# Altium PCB TFTAdapter Version 3.PcbDoc (part 1 of 3)
Units mm, origin at the board's own origin, x right, y up, seen from the top; angles counter-clockwise.
Board outline 130 x 67 mm, 4 copper layers (L1, L2, L3, L4), stack 0.905 mm thick; 77 components, 105 nets, 466 pads, 376 vias.
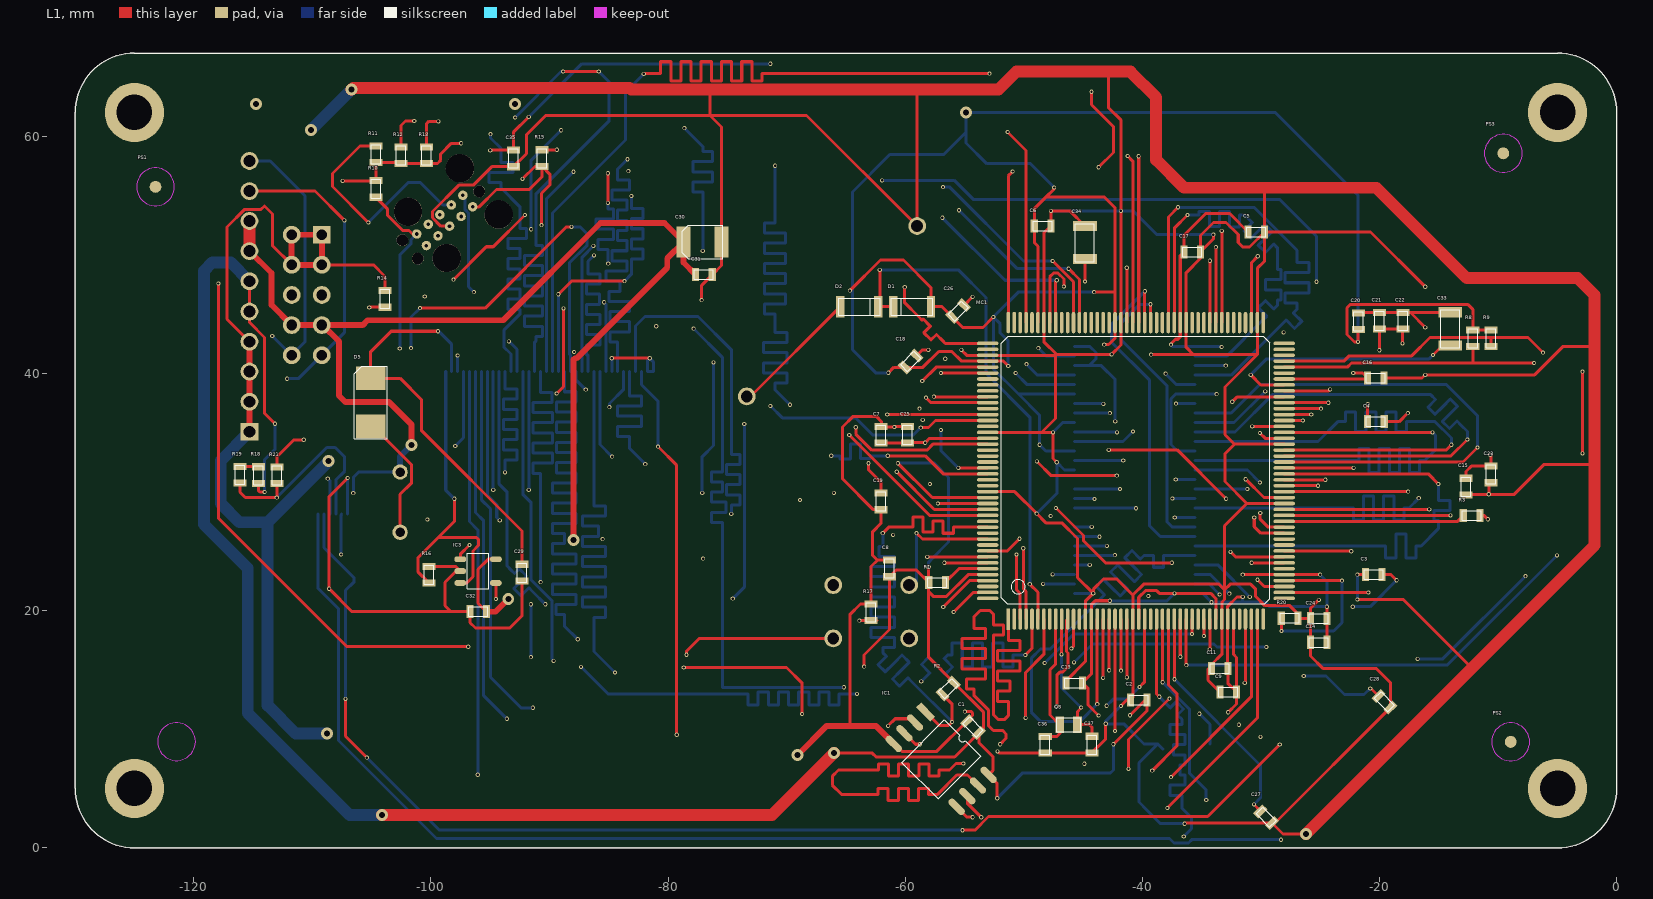
[diagram p0: L1 view]
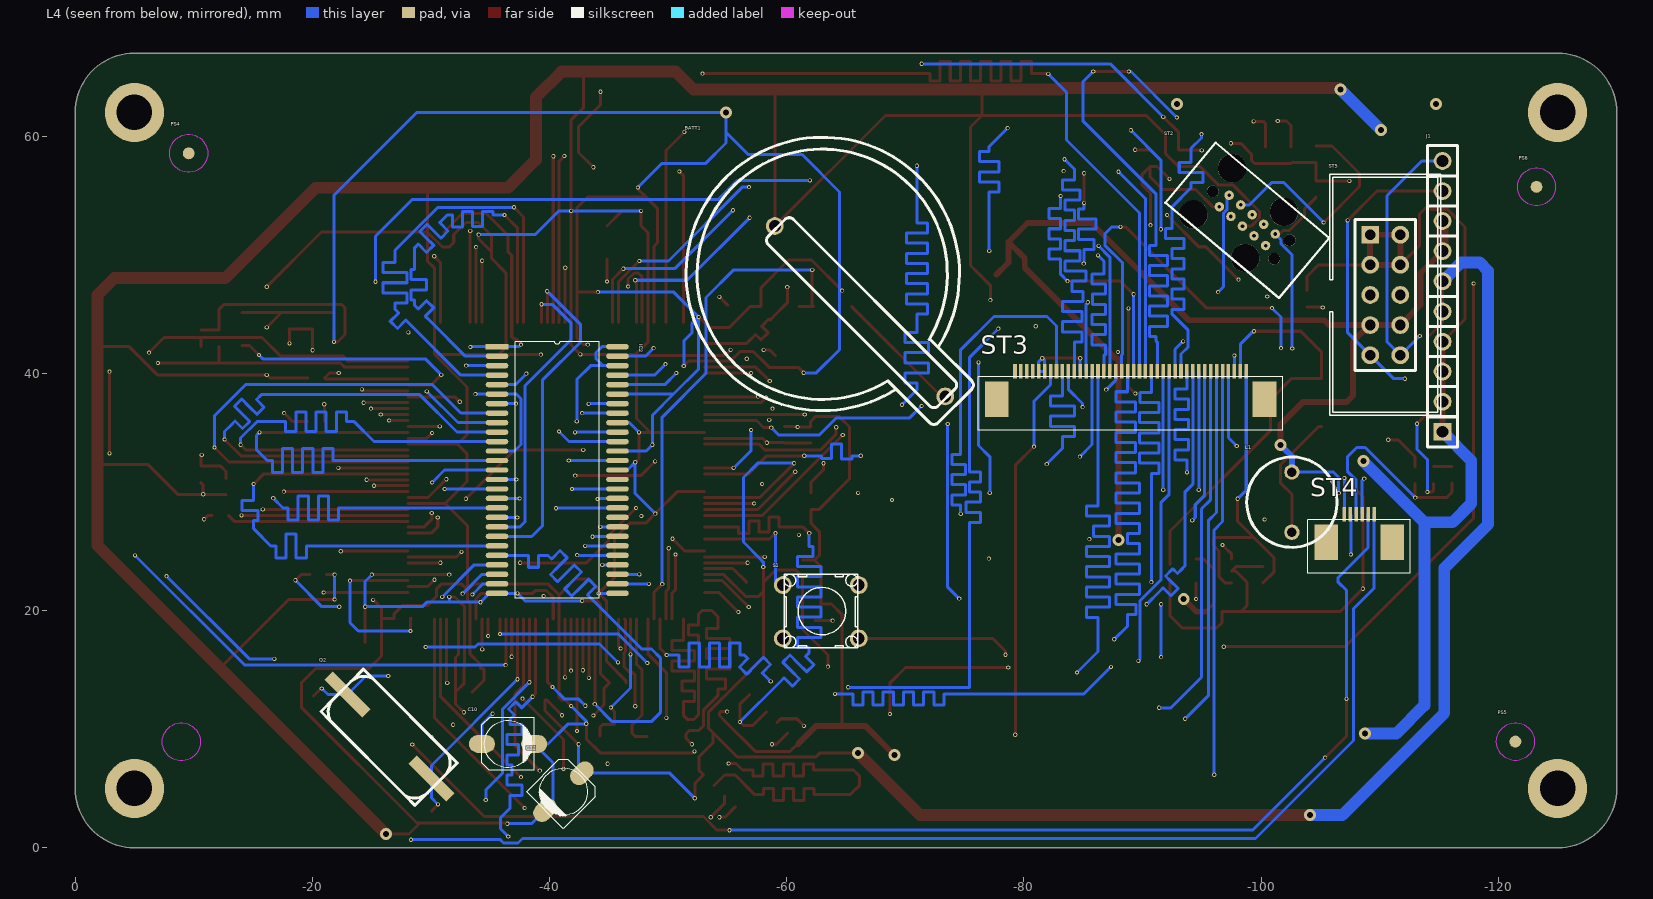
[diagram p1: L4 view, seen from below]
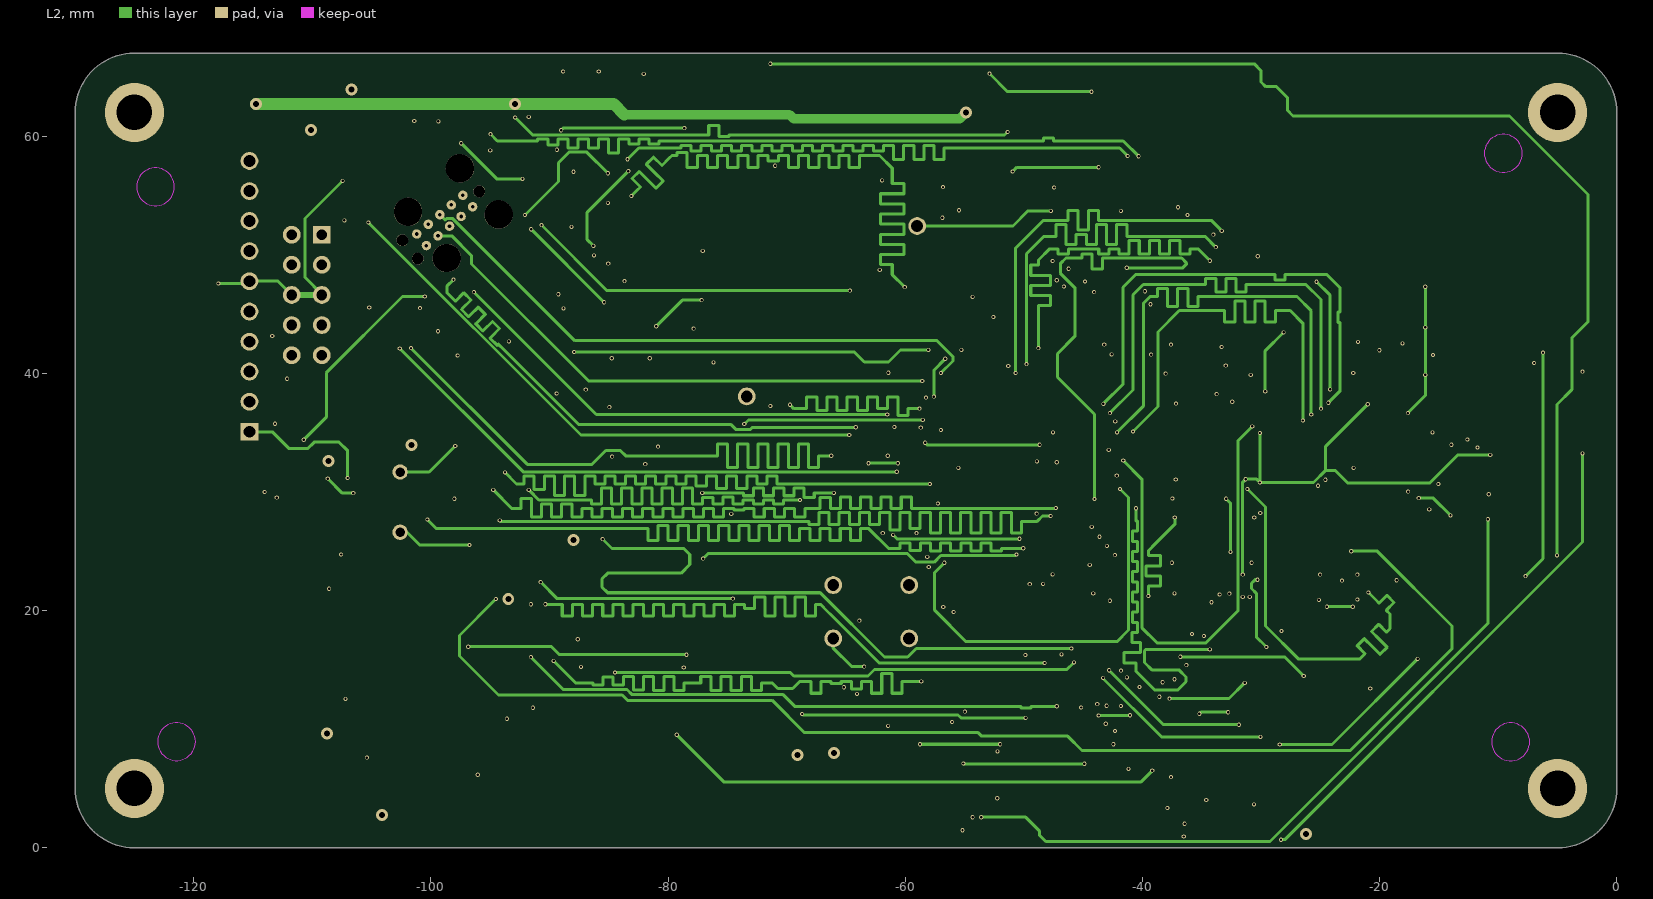
[diagram p2: L2]
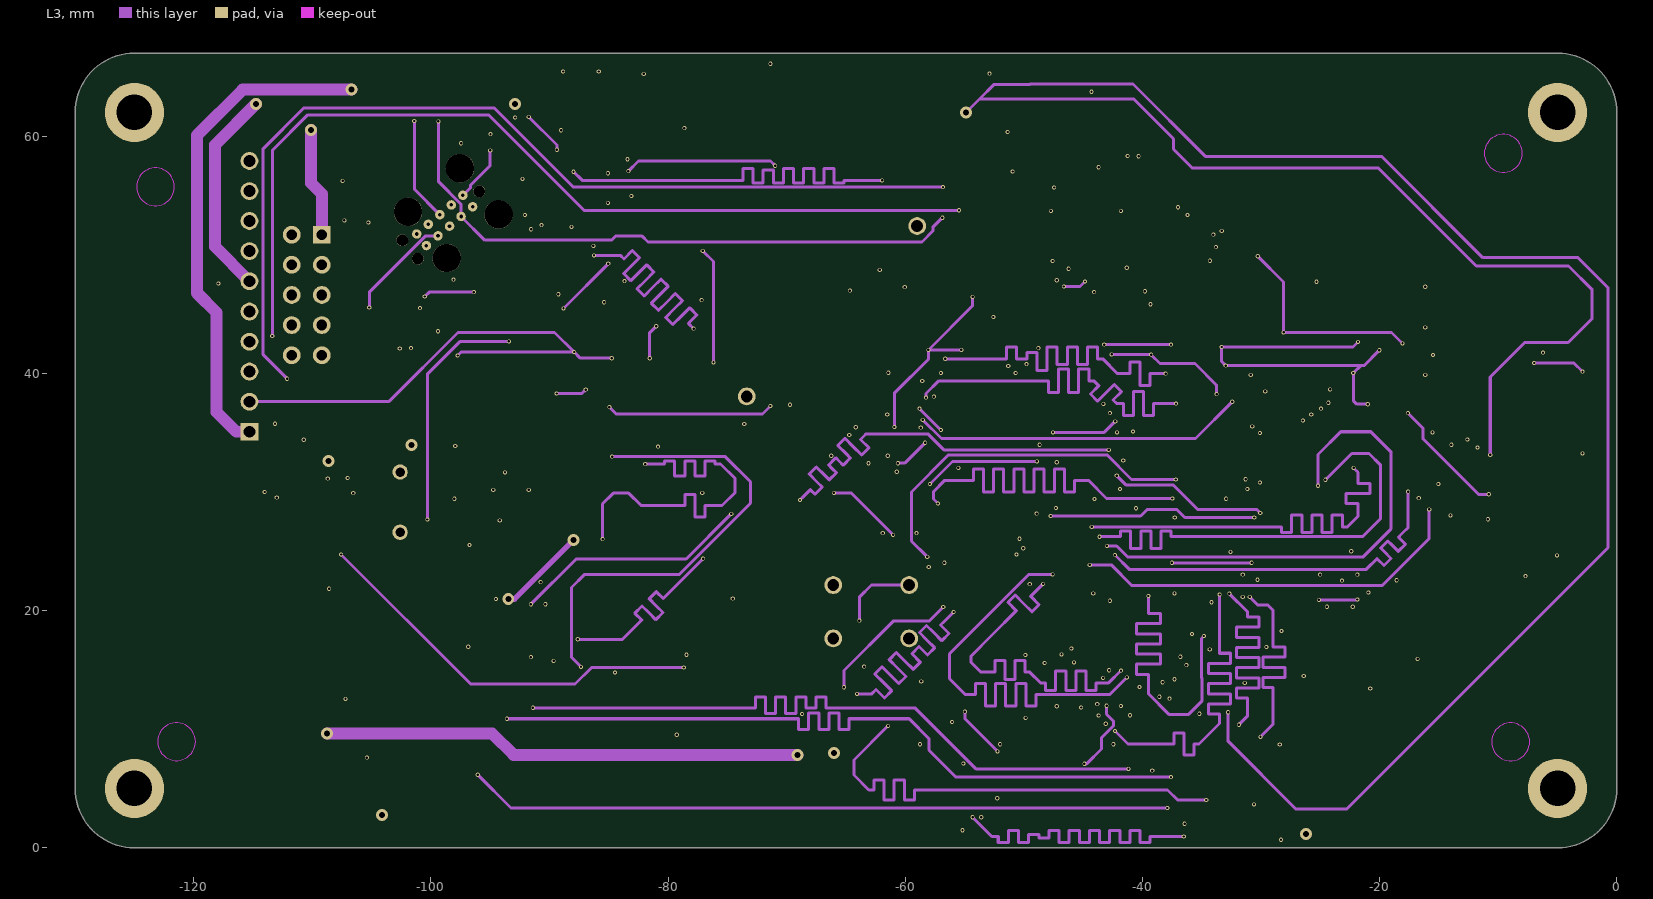
[diagram p3: L3]

## Layer stack, top to bottom
Top Solder: solder mask 0.0102, Solder Resist, Dk 3.5
L1: signal copper 0.0356
Dielectric 1: core 0.254, FR-4, Dk 4.2
L2: signal copper 0.036
Dielectric 3: prepreg 0.254, FR-4, Dk 4.2
L3: signal copper 0.036
Dielectric 2: core 0.254, FR-4, Dk 4.2
L4: signal copper 0.0356
Bottom Solder: solder mask 0.0102, Solder Resist, Dk 3.5

## Board outline
-130,5 -130,62 cw(c-125,62) -125,67 -5,67 cw(c-5,62) 0,62 0,5 cw(c-5,5) -5,0 -125,0 cw(c-125,5)

## Design rules (kind name [scope] priority, off if disabled: settings)
Clearance [All] p1: gap=0.1 ignorepadtopadclearanceinfootprint=FALSE
ComponentClearance [All] p1 off: gap=0.254 collisioncheckmode=3 verticalgap=0.254 showdistances=FALSE
HoleSize [All] p1: absolutevalues=TRUE maxlimit=3 minlimit=0.025 maxpercent=80.000 minpercent=20.000
MatchedLengths QSPI_Length [InNetClass('QSPI')] p1: tolerance=2.54 checknetsindiffpair=FALSE checkdiffpairvsdiffpair=TRUE checkxsignals=TRUE checkothers=TRUE
MatchedLengths LCD_Length [InNetClass('LCD')] p2: tolerance=2.54 checknetsindiffpair=FALSE checkdiffpairvsdiffpair=TRUE checkxsignals=TRUE checkothers=TRUE
MatchedLengths SDRAM_Length [InNetClass('SDRAM')] p3: tolerance=2.54 checknetsindiffpair=FALSE checkdiffpairvsdiffpair=TRUE checkxsignals=TRUE checkothers=TRUE
MinimumSolderMaskSliver [All] p1 off: minsoldermaskwidth=0.254
NetAntennae [All] p1 off: netantennaetolerance=0
PolygonConnect [All] p1: connectstyle=Relief reliefconductorwidth=0.254 reliefentries=4 polygonreliefangle="90 Angle" airgapwidth=0.254
RoutingVias [All] p1: holewidth=0.2 width=0.35 viastyle="Through Hole" minholewidth=0.2 minwidth=0.35 maxholewidth=0.5 maxwidth=1
SilkToSilkClearance [All] p1 off: silktosilkclearance=0.254
SilkToSolderMaskClearance [IsPad] p1 off: minsilkscreentomaskgap=0.254 clearancetoexposedcopper=TRUE
SolderMaskExpansion [All] p1: expansion=0.102
Width [All] p1: maxlimit=3 minlimit=0.14 preferedwidth=0.254
24 further rules are at their usual default settings.

## Classes and differential pairs
net class LCD: NetMC1_3 NetMC1_4 NetMC1_5 NetMC1_11 NetMC1_12 NetMC1_32 NetMC1_41 NetMC1_42 NetMC1_43 NetMC1_47 NetMC1_51 NetMC1_52 NetMC1_56 NetMC1_57 NetMC1_79 NetMC1_80 NetMC1_110 NetMC1_111 NetMC1_129 NetMC1_132 NetMC1_133 NetMC1_150 NetMC1_154 NetMC1_155 NetMC1_168 NetMC1_173 NetMC1_175
component class Prozessor: BATT1 C1 C2 C3 C4 C5 C6 C7 C8 C9 C10 C11 C12 C13 C14 C15 C16 C17 C18 C19 C20 C21 C22 C23 C24 C25 C26 C27 C28 C29 C30 C31 C32 C33 C34 C35 C36 C37 D1 D2 D5 IC1 IC2 IC3 L1 MC1 Q2 Q3 R1 R2 R3 R8 R9 R10 R11 R12 R13 R14 R15 R16 R17 R18 R19 R20 R21 S1 ST2 ST3 ST4
component class Spannungsversorgung: J1 ST5

## Components (designator, comment, footprint, x,y, rotation, side; value= is the part's Value field where it differs from the comment)
BATT1 "CR2032PCB" KnopfzellenhalterCR2032 -63.041,48.384 r225 bottom
C1 "100nF" C0603 -54.3,10.175 r315 top
C2 "100nF" C0603 -40.325,12.475 r0 top
C3 "100nF" C0603 -20.5,23.025 r0 top
C4 "100nF" C0603 -20.311,35.925 r180 top
C5 "100nF" C0603 -30.4,51.925 r180 top
C6 "100nF" C0603 -48.425,52.425 r180 top
C7 "100nF" C0603 -62.05,34.825 r270 top
C8 "100nF" C0603 -61.325,23.55 r270 top
C9 "100nF" C0603 -32.775,13.125 r0 top
C10 "1uF" Alu-Elko4x5 -36.506,8.75 r90 bottom
C11 "100nF" C0603 -33.475,15.125 r0 top
C12 "1uF" Alu-Elko4x5 -41.175,4.725 r225 bottom
C13 "100nF" C0603 -45.765,13.9 r0 top
C14 "100nF" C0603 -25.125,17.325 r0 top
C15 "100nF" C0603 -12.725,30.45 r90 top
C16 "100nF" C0603 -20.325,39.6 r180 top
C17 "100nF" C0603 -35.8,50.25 r180 top
C18 "100nF" C0603 -59.55,41 r225 top
C19 "100nF" C0603 -62.05,29.2 r90 top
C20 "100nF" C0603 -21.8,44.4 r270 top
C21 "100nF" C0603 -20.025,44.425 r270 top
C22 "100nF" C0603 -18.05,44.425 r270 top
C23 "100nF" C0603 -10.6,31.475 r90 top
C24 "100nF" C0603 -25.125,19.325 r0 top
C25 "100nF" C0603 -59.8,34.825 r270 top
C26 "100nF" C0603 -55.55,45.25 r225 top
C27 "22pF" C0603 -29.575,2.575 r135 top
C28 "22pF" C0603 -19.6,12.3 r135 top
C29 "100nF" C0603 -92.325,23.2 r90 top
C30 "2,2uF" CB -77.1,51.075 r180 top
C31 "100nF" C0603 -76.975,48.325 r180 top
C32 "100nF" C0603 -96,19.9 r0 top
C33 "2,2uF" C1206 -14.05,43.75 r90 top
C34 "2,2uF" C1206 -44.85,51.025 r90 top
C35 "220nF" C0603 -93.05,58.125 r90 top
C36 "10pF" C0603 -48.2,8.675 r270 top
C37 "10pF" C0603 -44.275,8.7 r270 top
D1 "BAS32" Minimelf -59.425,45.625 r180 top
D2 "BAS32" Minimelf -63.875,45.625 r0 top
D5 "SS16T3G" DO214AC/SMA -105.075,37.55 r90 top
IC1 "MT25QL128ABA1ESE-0SIT" "SOP2-8-208 (SO8W)" -56.975,7.45 r315 top
IC2 "AS4C4M16SA-6TCN" TSSOP(2)54 -40.65,31.85 r180 bottom
IC3 "CAT4238 / SOT23-5" SOT23-5 -96.025,23.325 r0 top
J1 "JUMP / 1-10" JUMPER1/10 -115.3,35.07 r90 bottom
L1 "47uH" P8X9 -102.6,31.68 r90 bottom
MC1 "STM32 F746 IG" QFP24x24-176-05 -40.55,31.775 r0 top
PS1 "Comment" PASSER-CIRCLE -123.225,55.725 r0 top
PS2 "Comment" PASSER-CIRCLE -8.95,8.925 r0 top
PS3 "Comment" PASSER-CIRCLE -9.575,58.55 r0 top
PS4 "Comment" PASSER-CIRCLE -9.575,58.55 r180 bottom
PS5 "Comment" PASSER-CIRCLE -121.45,8.95 r180 bottom
PS6 "Comment" PASSER-CIRCLE -123.225,55.725 r180 bottom
Q2 "25MHz" HC49S4SMD -26.504,9.375 r225 bottom
Q3 "32.768KHz" "SMD Uhrenquarz klein" -45.225,10.975 r180 top
R1 "10K" R0603 -57.325,22.375 r180 top
R2 "10K" R0603 -56.38,13.42 r45 top
R3 "0R" R0603 -12.25,28 r180 top
R8 "2,7K" R0603 -12.15,42.95 r90 top
R9 "2,7K" R0603 -10.625,42.95 r90 top
R10 "10K" R0603 -104.65,55.55 r90 top
R11 "10K" R0603 -104.65,58.475 r270 top
R12 "10K" R0603 -102.525,58.4 r270 top
R13 "10K" R0603 -100.375,58.4 r270 top
R14 "10K" R0603 -103.875,46.275 r270 top
R15 "47K" R0603 -90.625,58.15 r270 top
R16 "22R" R0603 -100.15,23.025 r270 top
R17 "10K" R0603 -62.9,19.85 r270 top
R18 "47K" R0603 -114.55,31.425 r270 top
R19 "0R" R0603 -116.1,31.45 r90 top
R20 "10K" R0603 -27.6,19.35 r180 top
R21 "0R" R0603 -112.975,31.4 r270 top
S1 "DTS62" DTS62 -62.875,19.9 r0 bottom
ST2 "ARM JTAG Nadeladapter 10-Pin" NADELADAPTER-10 -98.11,53.509 r220 bottom
ST3 "ZIF Connector 40pol" "ZIF Connector 40pol" -89,39 r180 bottom
ST4 "ZIF Connector 6pol" "ZIF Connector 6pol" -103.94,23.15 r180 bottom
ST5 "WLEISTE10" WLEISTE10_GERADE -109.2,51.69 r270 bottom

## Footprints (in the part's own frame and the unit in brackets; to place one, negate y for a bottom-side part, rotate by r counter-clockwise, add the part's x,y. Pads: shape width x height; smd on the part's side, far side on the other; paste and mask are expansions set on the pad)
Alu-Elko4x5 [mm] "Alu-Elko"
  oval 1.5x2.2 smd paste-0.05: 1(0,2.2) 2(0,-2.2)
  silkscreen extent -2.2,-2.2 2.2,2.2
C0603 [mm]
  rect 0.6x1.1 smd paste-0.05: 1(-0.7,0) 2(0.7,0)
  silkscreen extent -0.8,-0.4 0.8,0.4
C1206 [mm]
  rect 0.85x2 smd paste-0.05: 1(-1.4,0) 2(1.4,0)
  silkscreen extent -1.6,-0.8 1.6,0.8
CB [mm]
  rect 1.2x2.6 smd paste-0.05: 1(-1.6,0) 2(1.6,0)
  silkscreen extent -1.7,-1.4 1.7,1.4
DO214AC/SMA [mm]
  rect 2x2.5 smd paste-0.05: 1(-2.032,0) 2(2.032,0)
  silkscreen extent -3.05,-1.4 3.05,1.4
DTS62 [mm]
  round 1.5 hole 1: 1(-3.2,2.25) 2(-3.2,-2.25) 3(3.2,-2.25) 4(3.2,2.25)
  silkscreen extent -3.1,-3.15 3.1,3.05
HC49S4SMD [mm] "Quarz SMD"
  rect 4.5x1 smd: 1(-5,0) 2(5,0)
  silkscreen extent -5.58,-2.59 5.62,2.46
JUMPER1/10 [mm]
  rect 1.5x1.5 hole 1: 1(0,0)
  round 1.5 hole 1: 2(2.54,0) 3(5.08,0) 4(7.6,0) 5(10.14,0) 6(12.7,0) 7(15.24,0) 8(17.78,0) 9(20.3,0) 10(22.84,0)
  silkscreen extent -1.27,-1.27 24.13,1.27
KnopfzellenhalterCR2032 [mm]
  round 1.5 hole 1: 1(-5.715,0) 2(14.605,0)
  silkscreen extent -11.52,-11.52 15.75,11.52
Minimelf [mm]
  rect 0.7x1.8 smd paste-0.05: A(-1.6,0) K(1.6,0)
  silkscreen extent -1.75,-0.72 1.75,0.72
NADELADAPTER-10 [mm] "JTAG Nadeladapter"
  round 2.4 hole 2.4 unplated: 0(-2.858,2.54) 0(-2.857,-2.54) 0(2.857,2.54) 0(2.858,-2.54)
  round 1 hole 1 unplated: 0(-2.857,0) 0(4.762,-1.015) 0(4.763,1.015)
  round 0.8 hole 0.3: 1(-1.588,-0.635) 2(-0.318,-0.635) 3(0.953,-0.635) 4(2.222,-0.635) 5(3.492,-0.635) 6(3.493,0.635) 7(2.223,0.635) 8(0.952,0.635) 9(-0.317,0.635) 10(-1.588,0.635)
  silkscreen extent -5.3,-3.3 7.2,3.3
P8X9 [mm]
  round 1.3 hole 0.8: 1(0,0) 2(-5.08,0)
  silkscreen extent -6.35,-3.81 1.27,3.81
PASSER-CIRCLE [mm]
  round 1 smd paste-1.5 mask+1.1: 0(0,0)
  Keep-Out Layer circle w0.1: c0,0 r1.6
QFP24x24-176-05 [mm]
  rect 0.3x1.8 smd: 1(-10.765,-12.496)
  oval 0.3x1.8 smd: 2(-10.265,-12.496) 3(-9.765,-12.496) 4(-9.265,-12.496) 5(-8.765,-12.496) 6(-8.265,-12.496) 7(-7.765,-12.496) 8(-7.265,-12.496) 9(-6.765,-12.496) 10(-6.265,-12.496) 11(-5.765,-12.496) 12(-5.265,-12.496) 13(-4.765,-12.496) 14(-4.265,-12.496) 15(-3.765,-12.496) 16(-3.265,-12.496) 17(-2.765,-12.496) 18(-2.265,-12.496) 19(-1.765,-12.496) 20(-1.265,-12.496) 21(-0.765,-12.496) 22(-0.265,-12.496) 23(0.235,-12.496) 24(0.735,-12.496) 25(1.235,-12.496) 26(1.735,-12.496) 27(2.235,-12.496) 28(2.735,-12.496) 29(3.235,-12.496) 30(3.735,-12.496) 31(4.235,-12.496) 32(4.735,-12.496) 33(5.235,-12.496) 34(5.735,-12.496) 35(6.235,-12.496) 36(6.735,-12.496) 37(7.235,-12.496) 38(7.735,-12.496) 39(8.235,-12.496) 40(8.735,-12.496) 41(9.235,-12.496) 42(9.735,-12.496) 43(10.235,-12.496) 44(10.735,-12.496) 89(10.735,12.504) 90(10.235,12.504) 91(9.735,12.504) 92(9.235,12.504) 93(8.735,12.504) 94(8.235,12.504) 95(7.735,12.504) 96(7.235,12.504) 97(6.735,12.504) 98(6.235,12.504) 99(5.735,12.504) 100(5.235,12.504) 101(4.735,12.504) 102(4.235,12.504) 103(3.735,12.504) 104(3.235,12.504) 105(2.735,12.504) 106(2.235,12.504) 107(1.735,12.504) 108(1.235,12.504) 109(0.735,12.504) 110(0.235,12.504) 111(-0.265,12.504) 112(-0.765,12.504) 113(-1.265,12.504) 114(-1.765,12.504) 115(-2.265,12.504) 116(-2.765,12.504) 117(-3.265,12.504) 118(-3.765,12.504) 119(-4.265,12.504) 120(-4.765,12.504) 121(-5.265,12.504) 122(-5.765,12.504) 123(-6.265,12.504) 124(-6.765,12.504) 125(-7.265,12.504) 126(-7.765,12.504) 127(-8.265,12.504) 128(-8.765,12.504) 129(-9.265,12.504) 130(-9.765,12.504) 131(-10.265,12.504) 132(-10.765,12.504)
  oval 1.8x0.3 smd: 45(12.5,-10.75) 46(12.5,-10.25) 47(12.5,-9.75) 48(12.5,-9.25) 49(12.5,-8.75) 50(12.5,-8.25) 51(12.5,-7.75) 52(12.5,-7.25) 53(12.5,-6.75) 54(12.5,-6.25) 55(12.5,-5.75) 56(12.5,-5.25) 57(12.5,-4.75) 58(12.5,-4.25) 59(12.5,-3.75) 60(12.5,-3.25) 61(12.5,-2.75) 62(12.5,-2.25) 63(12.5,-1.75) 64(12.5,-1.25) 65(12.5,-0.75) 66(12.5,-0.25) 67(12.5,0.25) 68(12.5,0.75) 69(12.5,1.25) 70(12.5,1.75) 71(12.5,2.25) 72(12.5,2.75) 73(12.5,3.25) 74(12.5,3.75) 75(12.5,4.25) 76(12.5,4.75) 77(12.5,5.25) 78(12.5,5.75) 79(12.5,6.25) 80(12.5,6.75) 81(12.5,7.25) 82(12.5,7.75) 83(12.5,8.25) 84(12.5,8.75) 85(12.5,9.25) 86(12.5,9.75) 87(12.5,10.25) 88(12.5,10.75) 133(-12.5,10.75) 134(-12.5,10.25) 135(-12.5,9.75) 136(-12.5,9.25) 137(-12.5,8.75) 138(-12.5,8.25) 139(-12.5,7.75) 140(-12.5,7.25) 141(-12.5,6.75) 142(-12.5,6.25) 143(-12.5,5.75) 144(-12.5,5.25) 145(-12.5,4.75) 146(-12.5,4.25) 147(-12.5,3.75) 148(-12.5,3.25) 149(-12.5,2.75) 150(-12.5,2.25) 151(-12.5,1.75) 152(-12.5,1.25) 153(-12.5,0.75) 154(-12.5,0.25) 155(-12.5,-0.25) 156(-12.5,-0.75) 157(-12.5,-1.25) 158(-12.5,-1.75) 159(-12.5,-2.25) 160(-12.5,-2.75) 161(-12.5,-3.25) 162(-12.5,-3.75) 163(-12.5,-4.25) 164(-12.5,-4.75) 165(-12.5,-5.25) 166(-12.5,-5.75) 167(-12.5,-6.25) 168(-12.5,-6.75) 169(-12.5,-7.25) 170(-12.5,-7.75) 171(-12.5,-8.25) 172(-12.5,-8.75) 173(-12.5,-9.25) 174(-12.5,-9.75) 175(-12.5,-10.25) 176(-12.5,-10.75)
  silkscreen extent -11.38,-11.22 11.29,11.36
R0603 [mm]
  rect 0.6x1.1 smd paste-0.05: 1(-0.7,0) 2(0.7,0)
  silkscreen extent -0.8,-0.4 0.8,0.4
"SMD Uhrenquarz klein" [mm] "SMD Quarz 32.768kHz"
  rect 0.75x1.4 smd: 1(0.25,0.6) 2(1.75,0.6)
  silkscreen extent 0,0 2,1.2
"SOP2-8-208 (SO8W)" [mm]
  rect 1.7x0.6 smd: 1(-3.75,1.905)
  oval 1.7x0.6 smd: 2(-3.75,0.635) 3(-3.75,-0.635) 4(-3.75,-1.905) 5(3.75,-1.905) 6(3.75,-0.635) 7(3.75,0.635) 8(3.75,1.905)
  silkscreen extent -2.17,-2.54 2.17,2.54
SOT23-5 [mm]
  oval 1x0.5 smd paste-0.05: 1(-1.5,1) 2(-1.5,0) 3(-1.5,-1) 4(1.5,-1) 5(1.5,1)
  silkscreen extent -0.9,-1.5 0.9,1.5
TSSOP(2)54 [mm]
  rect 1.905x0.458 smd: 1(-5.08,10.4)
  oval 1.905x0.458 smd: 2(-5.08,9.6) 3(-5.08,8.8) 4(-5.08,8) 5(-5.08,7.2) 6(-5.08,6.4) 7(-5.08,5.6) 8(-5.08,4.8) 9(-5.08,4) 10(-5.08,3.2) 11(-5.08,2.4) 12(-5.08,1.6) 13(-5.08,0.8) 14(-5.08,0) 15(-5.08,-0.8) 16(-5.08,-1.6) 17(-5.08,-2.4) 18(-5.08,-3.2) 19(-5.08,-4) 20(-5.08,-4.8) 21(-5.08,-5.6) 22(-5.08,-6.4) 23(-5.08,-7.2) 24(-5.08,-8) 25(-5.08,-8.8) 26(-5.08,-9.6) 27(-5.08,-10.4) 28(5.08,-10.4) 29(5.08,-9.6) 30(5.08,-8.8) 31(5.08,-8) 32(5.08,-7.2) 33(5.08,-6.4) 34(5.08,-5.6) 35(5.08,-4.8) 36(5.08,-4) 37(5.08,-3.2) 38(5.08,-2.4) 39(5.08,-1.6) 40(5.08,-0.8) 41(5.08,0) 42(5.08,0.8) 43(5.08,1.6) 44(5.08,2.4) 45(5.08,3.2) 46(5.08,4) 47(5.08,4.8) 48(5.08,5.6) 49(5.08,6.4) 50(5.08,7.2) 51(5.08,8) 52(5.08,8.8) 53(5.08,9.6) 54(5.08,10.4)
  silkscreen extent -3.55,-10.8 3.55,10.8
WLEISTE10_GERADE [mm]
  rect 1.5x1.5 hole 0.9: 1(0,0)
  round 1.5 hole 0.9: 2(0,2.54) 3(2.54,0) 4(2.54,2.54) 5(5.08,0) 6(5.08,2.54) 7(7.62,0) 8(7.62,2.54) 9(10.16,0) 10(10.16,2.54)
  silkscreen extent -5.08,-3.43 15.24,5.97
"ZIF Connector 6pol" [mm] "ZIF Connector 6pol Top Contact"
  rect 2x3 smd: 0(1.545,2.625) 0(7.11,2.625)
  rect 0.3x1.25 smd: 1(5.585,4.975) 2(5.085,4.975) 3(4.585,4.975) 4(4.085,4.975) 5(3.585,4.975) 6(3.085,4.975)
  silkscreen extent 0,0 8.65,4.5
"ZIF Connector 40pol" [mm] "ZIF Connector 40pol Top Contact"
  rect 2x3 smd: 0(-11.29,-1.175) 0(11.29,-1.175)
  rect 0.3x1.25 smd: 1(9.75,1.175) 2(9.25,1.175) 3(8.75,1.175) 4(8.25,1.175) 5(7.75,1.175) 6(7.25,1.175) 7(6.75,1.175) 8(6.25,1.175) 9(5.75,1.175) 10(5.25,1.175) 11(4.75,1.175) 12(4.25,1.175) 13(3.75,1.175) 14(3.25,1.175) 15(2.75,1.175) 16(2.25,1.175) 17(1.75,1.175) 18(1.25,1.175) 19(0.75,1.175) 20(0.25,1.175) 21(-0.25,1.175) 22(-0.75,1.175) 23(-1.25,1.175) 24(-1.75,1.175) 25(-2.25,1.175) 26(-2.75,1.175) 27(-3.25,1.175) 28(-3.75,1.175) 29(-4.25,1.175) 30(-4.75,1.175) 31(-5.25,1.175) 32(-5.75,1.175) 33(-6.25,1.175) 34(-6.75,1.175) 35(-7.25,1.175) 36(-7.75,1.175) 37(-8.25,1.175) 38(-8.75,1.175) 39(-9.25,1.175) 40(-9.75,1.175)
  silkscreen extent -12.83,-3.8 12.84,0.7

## Part data
BATT1: library part "CR2032 / HALTER", "Knopfzellenhalter für Lithium-Batterie CR2032"
C1 C2 C3 C4 C5 C6 C7 C8 C9 C11 C13 C14 C15 C16 C17 C18 C19 C20 C21 C22 C23 C24 C25 C26 C29 C31 C32: library part "0603 / 100nF", "100nF 0603 SMD-Keramik X7R 10% 50V"
C10 C12: library part "1uF / 50V", "SMD-Alu Elko 1uF / 50V"
C27 C28: library part "0603 / 22pF", "22pF 0603 SMD-Keramik X7R 10% 50V"
C30: library part "2,2uF / 25V", "SMD-Tantal 2,2uF / 25V 20% B"
C33 C34: library part "1206 / 2,2uF", "2,2uF 1206 SMD-Keramik 10% 50V XR7"
C35: library part "0603 / 220nF", "220nF 0603 SMD-Keramik X7R 10% 50V"
C36 C37: library part "0603 / 10pF", "10pF 0603 SMD-Keramik X7R 10% 50V"
D1 D2: library part "BAS32 / MINIMELF", "SMD Si-Diode 100V 0,2A Minimelf"
D5: "Schottky Diode 60V 1A"
IC1: library part "MT25QL128ABA1ESE-0SIT / SO8W", "SPI-NOR-Flash 128Mb"
IC2: library part "AS4C4M16SA-6TCN / SO8W_1", "SDRAM 64Mb"
IC3: "LED Driver, Boost, 10LED"
J1: "Stiftleiste 10polig RM2,54"
L1: library part "47uH / P8X9", "Tonneninduktivität stehend"
MC1: "LQFP 1176 24x24"
Q2: library part "HC49 S / 8", "SMD Schwingquarz 8MHz HC49S$SMD 30ppm"
Q3: library part ZM315-32.768, "SMD Schwingquarz 32.768KHz 15ppm"
R1 R2 R10 R11 R12 R13 R14 R17 R20: library part "0603 / 10K", "10K 0603 SMD-Kohleschicht 1% 0,1W"
R3 R19 R21: library part "0603 / 0R", "0R 0603 SMD-Kohleschicht 1% 0,1W"
R8 R9: library part "0603 / 2,7K", "2,7K 0603 SMD-Kohleschicht 1% 0,1W"
R15 R18: library part "0603 / 47K", "47K 0603 SMD-Kohleschicht 1% 0,1W"
R16: library part "0603 / 22R", "22R 0603 SMD-Kohleschicht 1% 0,1W"
S1: library part "DTS62 / N", "Leiterplattentaster 6x6mm 1,6N"
ST3: library part "ZIF Connector 40pol Top Contact", "ZIF Connector 40pol Top Contact"
ST4: library part "ZIF Connector 6pol Top Contact", "ZIF Connector 6pol Top Contact"
ST5: "Wannenleiste 10polig"

## Free pads (board coordinates)
  round 5 hole 3: 3(-125,5) 3(-125,62) 3(-5,5) 3(-5,62)

## Via types
v1: diameter 0.35, hole 0.2, L1 to L4, 362 vias
v2: diameter 1, hole 0.5, L1 to L4, 14 vias

## Nets (pads, with @x,y where several pads share a name; then routed paths per layer and width w, separated by ;. In a path a pad name is that pad's centre, name@x,y a point inside that pad or via, vN(x,y) a via of type N, cw(c..) or ccw(c..) an arc to the next point about the centre after c; other vN are vias at no path point)
GND: BATT1.1 C1.1 C2.1 C3.1 C4.1 C5.1 C6.1 C7.1 C8.1 C9.1 C10.2 C11.1 C12.2 C13.1 C14.1 C15.1 C16.1 C17.1 C18.1 C19.1 C20.1 C21.1 C22.1 C23.1 C24.1 C25.1 C26.1 C27.1 C28.1 C29.1 C30.1 C31.1 C32.1 C33.2 C34.2 C35.1 C36.2 C37.2 IC1.4 IC2.6 IC2.12 IC2.28 IC2.41 IC2.46 IC2.52 IC2.54 IC3.2 J1.1 J1.2 J1.3 J1.4 MC1.14 MC1.22 MC1.37 MC1.61 MC1.71 MC1.90 MC1.102 MC1.113 MC1.126 MC1.135 MC1.148 MC1.158 R14.1 R16.1 R17.1 R20.1 ST2.3 ST3.3 ST3.29 ST3.35 ST3.36 ST4.6 ST5.1 ST5.2 ST5.3 ST5.4 | length 1107.7
  L1 w0.254: J1.4@-115.3,42.67 -117.2,44.57 -117.2,52.332 -115.705,53.827 -114.323,53.827 -114.03,54.12 -113.35,53.44 -113.35,50.76 ST5.4@-111.74,49.15 ; ST5.3@-109.2,49.15 -104.85,49.15 -103.875,48.175 R14.1@-103.875,46.975 ; ST5.1@-109.2,51.54 -109.35,51.69 ST5.1@-109.2,51.69 ; v1(-107.025,31.175) -108.585,29.615 v1(-108.585,21.835) -106.65,19.9 -98.3,19.9 ; R16.1@-100.15,23.725 -97.925,23.725 IC3.2@-97.525,23.325 -97.862,23.325 -98.804,22.383 -98.804,20.404 -98.3,19.9 ; ST2.3@-98.432,52.411 -99.162,52.411 -99.875,53.124 -99.875,53.643 -97.653,55.865 -96.43,55.865 -94.87,57.425 C35.1@-93.05,57.425 -91.95,58.525 -91.95,60.125 -90.325,61.75 -76.475,61.75 ; C29.1@-92.325,22.5 -92.325,19.55 -93.35,18.525 -96.25,18.525 -96.7,18.975 C32.1@-96.7,19.9 -98.3,19.9 ; v1(-84.75,41.275) v1(-81.55,41.275) ; v1(-77.175,46.175) -77.175,47.425 C31.1@-76.275,48.325 -75.5,49.1 C30.1@-75.5,51.075 -75.5,60.775 -76.475,61.75 ; -76.475,63.925 -76.475,61.75 ; -64.675,10.275 -64.675,19.65 -63.775,20.55 R17.1@-62.9,20.55 -62.891,20.559 -62.891,23.709 -62.35,24.25 ; C7.1@-62.05,35.525 C7.1@-62,35.475 ; C8.1@-61.325,24.25 -62.35,24.25 ; IC1.4@-60.974,8.755 -60.905,8.755 -60.275,8.125 -57.34,8.125 C1.1@-54.795,10.67 -54.325,11.14 -54.325,11.375 -54.425,11.475 v1(-54.975,11.475) ; C25.1@-59.8,35.525 -60.875,35.525 v1(-60.925,35.475) C7.1@-62,35.475 ; C18.1@-59.055,41.495 -58.575,41.975 v1(-58.05,41.975) ; -58.925,63.925 -59,63.85 BATT1.1@-59,52.425 -68.325,61.75 -76.475,61.75 ; v1(-55.275,41.975) -54.825,41.525 MC1.135@-53.05,41.525 -47.325,41.525 ; C26.1@-55.055,45.745 -55.03,45.745 v1(-54.325,46.45) ; MC1.158@-53.05,30.025 -50.775,30.025 v1(-48.925,28.175) -48.15,27.4 -46.8,27.4 -45.475,26.075 -45.475,22.775 v1(-44.15,21.45) ; MC1.148@-53.05,35.025 v1(-47.55,35.025) -47.55,32.825 v1(-47.225,32.5) ; v1(-52.225,8.125) -52.075,7.975 C36.2@-48.2,7.975 -44.3,7.975 C37.2@-44.275,8 -43.1,9.175 v1(-43.1,10.45) ; -48.475,35.05 -47.325,36.2 -47.325,41.525 ; C13.1@-46.465,13.9 -46.465,14.046 -44.815,15.696 MC1.14@-44.815,19.279 -44.815,20.785 v1(-44.15,21.45) ; C34.2@-44.85,52.425 -46.125,53.7 v1(-47.725,53.7) C6.1@-47.725,52.425 -48.315,51.835 MC1.126@-48.315,44.279 -48.315,42.665 -47.25,41.6 ; -42.875,65.45 -42.875,62.425 -41.825,61.375 v1(-41.825,53.7) -41.815,53.69 MC1.113@-41.815,44.279 -41.815,42.385 v1(-42.6,41.6) -47.25,41.6 ; v1(-41.825,11.95) -41.3,12.475 C2.1@-41.025,12.475 -40.815,12.685 MC1.22@-40.815,19.279 -40.815,21.305 ; v1(-39.275,41.575) -39.265,41.585 -35.71,41.585 ; v1(-36.45,2.025) -36.395,2.08 C27.1@-29.08,2.08 ; v1(-34.025,51.7) -34.025,51.325 C17.1@-35.1,50.25 ; C9.1@-33.475,13.125 -34.475,14.125 -34.475,15.05 -34.4,15.125 C11.1@-34.175,15.125 -34.175,15.45 -33.315,16.31 MC1.37@-33.315,19.279 -33.315,20.685 -33.075,20.925 -33.075,21.256 -33.077,21.258 -33.077,21.748 ; -29.7,55.65 C5.1@-29.7,51.925 ; MC1.61@-28.05,29.025 -31.2,29.025 ; MC1.71@-28.05,34.025 -32.25,34.025 ; v2(-26.225,1.15) -28.15,1.15 C27.1@-29.08,2.08 ; v1(-25.125,20.9) -25.825,20.2 C24.1@-25.825,19.325 ; v1(-21.875,20.925) -18,20.925 -12.225,15.15 ; v1(-21.875,23.025) C3.1@-21.2,23.025 ; C20.1@-21.8,45.1 -21.775,45.125 C21.1@-20.025,45.125 C22.1@-18.05,45.125 ; C16.1@-19.625,39.6 -16.425,39.6 v1(-16.15,39.875) -6.925,39.875 -4.525,42.275 -1.875,42.275 ; C4.1@-19.611,35.925 -18.35,35.925 v1(-17.625,36.65) ; v1(-16.15,43.875) -17.4,45.125 C22.1@-18.05,45.125 ; v1(-16.15,47.3) -20.775,51.925 C5.1@-29.7,51.925 ; C33.2@-14.05,45.15 -18.025,45.15 C22.1@-18.05,45.125 ; C15.1@-12.725,29.75 -12.675,29.8 v1(-10.8,29.8) ; C23.1@-10.6,30.775 -10.8,30.575 v1(-10.8,29.8) ; -1.875,32.325 -6.125,32.325 -8.65,29.8 v1(-10.8,29.8) ; -62.35,24.25 -62.75,24.65 -62.75,26.65 -62.05,27.35 C19.1@-62.05,28.5 -62.692,28.5 -65.3,31.108 -65.3,35.475 -64.4,36.375 -62.45,36.375 -62,35.925 C7.1@-62,35.475 ; -47.325,41.525 -47.25,41.6 ; v1(-44.15,21.45) -44.15,21.789 -43.289,22.65 -42.16,22.65 -40.815,21.305 ; -40.815,21.305 -39.899,22.221 -33.55,22.221 -33.077,21.748 ; -35.71,41.585 -30.315,41.585 ; -35.71,41.585 -36.315,42.19 MC1.102@-36.315,44.279 -36.315,48.485 -35.1,49.7 C17.1@-35.1,50.25 ; C17.1@-35.1,50.25 -35.1,51.631 -34.006,52.725 -32.95,52.725 -31.925,51.7 -31.925,51.025 -31.55,50.65 -30.975,50.65 C5.1@-29.7,51.925 ; -33.077,21.748 -32.6,22.225 -30.875,22.225 -30.45,21.8 -30.45,21.175 -29.681,20.406 -27.581,20.406 -26.9,19.725 R20.1@-26.9,19.35 -26.875,19.325 C24.1@-25.825,19.325 ; -33.077,21.748 -33.077,27.148 -31.2,29.025 ; -32.25,34.025 -33.05,33.225 -33.05,30.875 -31.2,29.025 ; -32.25,34.025 -33.05,34.825 -33.05,38.85 -30.315,41.585 ; -30.315,41.585 MC1.90@-30.315,44.279 -30.315,48.86 -29.7,49.475 C5.1@-29.7,51.925 ; C27.1@-29.08,2.08 -28.83,2.08 C28.1@-19.105,11.805 -19.105,13.93 -20.275,15.1 -24.75,15.1 -25.825,16.175 C14.1@-25.825,17.325 C24.1@-25.825,19.325
  L1 w0.5: J1.1@-115.3,35.07 J1.2@-115.3,37.61 J1.3@-115.3,40.15 J1.4@-115.3,42.67 ; ST5.1@-109.35,51.69 ST5.2@-111.74,51.69 ST5.4@-111.74,49.15 ST5.3@-109.2,49.15 ST5.1@-109.2,51.54 ; v2(-69.075,7.825) -66.625,10.275 -64.675,10.275 -62.494,10.275 IC1.4@-60.974,8.755
  L1 w1: v2(-106.7,63.925) -106.55,64.075 -83.254,64.075 -83.104,63.925 -76.475,63.925 -58.925,63.925 -52.15,63.925 -50.625,65.45 -42.875,65.45 -41.025,65.45 -38.85,63.275 -38.85,58 -36.5,55.65 -29.7,55.65 -20.275,55.65 -12.65,48.025 -3.3,48.025 -1.875,46.6 -1.875,42.275 -1.875,32.325 -1.875,25.5 -12.225,15.15 v2(-26.225,1.15)
  L3 w0.254: J1.2@-115.3,37.61 -103.565,37.61 -97.725,43.45 -89.575,43.45 v1(-87.925,41.8) ; v1(-97.75,41.5) -97.45,41.8 v1(-87.925,41.8) ; v1(-84.75,41.275) -87.4,41.275 v1(-87.925,41.8) ; v1(-81.55,41.275) -81.55,43.425 v1(-81,43.975) ; v1(-60.925,35.475) -60.925,38.325 -58.05,41.2 v1(-58.05,41.975) ; v1(-55.275,41.975) v1(-58.05,41.975) ; v1(-54.975,11.475) -54.975,10.875 v1(-52.225,8.125) ; v1(-54.325,46.45) -54.325,45.7 v1(-58.05,41.975) ; v1(-47.55,35.025) -43.225,35.025 v1(-42.3,35.95) ; v1(-42.6,41.6) -42.575,41.575 v1(-39.275,41.575) -38.525,40.825 -35.575,40.825 -33.75,39 v1(-33.75,38.25) ; v1(-25.125,20.9) -21.9,20.9 v1(-21.875,20.925) ; v1(-17.625,36.65) -16.35,35.375 -16.35,34.475 -11.675,29.8 v1(-10.8,29.8)
  L3 w1: J1.1@-115.3,35.07 -116.42,35.07 -118.075,36.725 -118.075,45.125 -119.725,46.775 -119.725,60.075 -115.875,63.925 v2(-106.7,63.925) ; v2(-110.1,60.525) -110.1,56.025 -109.2,55.125 ST5.1@-109.2,51.69 ; v2(-108.75,9.625) -94.825,9.625 -93.025,7.825 v2(-69.075,7.825)
  L2 w0.254: J1.1@-115.3,35.07 -113.37,35.07 -111.95,33.65 -110.4,33.65 -109.85,34.2 -107.75,34.2 -107.025,33.475 v1(-107.025,31.175) ; v1(-87.925,41.8) -64.3,41.8 -63.45,40.95 -61.425,40.95 -60.4,41.975 v1(-58.05,41.975) ; v1(-81,43.975) -78.8,46.175 v1(-77.175,46.175) ; BATT1.1@-59,52.425 -50.925,52.425 -49.65,53.7 v1(-47.725,53.7) ; v1(-17.625,36.65) -16.15,38.125 v1(-16.15,39.875) v1(-16.15,43.875) v1(-16.15,47.3)
  L4 w0.254: v2(-108.625,32.6) v2@-108.585,32.56 ; ST4.6@-107.025,28.125 v1(-107.025,31.175) ; ST3.3@-97.75,40.175 v1(-97.75,41.5) ; ST3.29@-84.75,40.175 v1(-84.75,41.275) ; v1(-48.925,28.175) -47.225,29.875 v1(-47.225,32.5) -46.575,31.85 IC2.41@-45.73,31.85 ; v1(-47.725,53.7) v1(-41.825,53.7) -40.8,53.7 -38.8,51.7 v1(-34.025,51.7) ; v1(-47.55,35.025) -46.725,35.85 IC2.46@-45.73,35.85 ; IC2.28@-45.73,21.45 v1(-44.15,21.45) ; IC2.52@-45.73,40.65 -44.495,40.65 ; IC2.54@-45.73,42.25 -44.425,42.25 -43.925,41.75 -43.925,41.22 -44.495,40.65 ; v1(-42.3,35.95) -42.3,39.475 -43.475,40.65 -44.495,40.65 ; v1(-41.825,11.95) -43.1,10.675 v1(-43.1,10.45) -41.575,10.45 -39.875,8.75 C10.2@-38.706,8.75 ; C10.2@-38.269,8.313 C10.2@-38.706,8.75 ; v1(-36.45,2.025) -38.475,2.025 C12.2@-39.619,3.169 -40.3,3.85 -40.3,7.156 C10.2@-38.706,8.75 ; IC2.12@-35.57,33.45 -37.05,33.45 -37.596,33.996 -37.596,37.854 -37.2,38.25 IC2.6@-35.57,38.25 v1(-33.75,38.25) ; v1(-21.875,20.925) v1(-21.875,23.025) ; ST3.35@-81.75,40.175 ST3.36@-81.25,40.175 -81.25,40.975 v1(-81.55,41.275) -81.75,41.075 ST3.35@-81.75,40.175
  L4 w1: J1.1@-115.3,35.07 -117.725,32.645 -117.725,29.025 -116.15,27.45 -113.775,27.45 ; v2(-110.1,60.525) v2(-106.7,63.925) ; v2(-108.75,9.625) -111.4,9.625 -113.775,12 -113.775,27.45 ; v2(-108.625,32.6) -113.775,27.45
NetBATT1_2: BATT1.2 D2.A | length 11
  L1 w0.254: BATT1.2@-73.368,38.057 -73.043,38.057 D2.A@-65.475,45.625
NetC27_2: C27.2 MC1.29 Q2.2 | length 19.7
  L1 w0.254: MC1.29@-37.315,19.279 -37.315,14.215 v1(-37.3,14.2) ; v1(-30.6,3.65) -30.07,3.12 C27.2@-30.07,3.07
  L4 w0.254: v1(-37.3,14.2) -30.04,6.94 Q2.2@-30.04,5.839 -30.04,4.21 v1(-30.6,3.65)
NetC28_2: C28.2 MC1.30 Q2.1 | length 21.7
  L1 w0.254: MC1.30@-36.815,19.279 -36.815,16.115 v1(-36.8,16.1) ; v1(-20.8,13.425) -20.725,13.425 C28.2@-20.095,12.795
  L2 w0.254: v1(-36.8,16.1) -28.025,16.1 v1(-26.4,14.475)
  L4 w0.254: v1(-26.4,14.475) -24.533,14.475 Q2.1@-22.969,12.911 -21.314,12.911 v1(-20.8,13.425)
NetC29_2: C29.2 D5.2 ST3.2 | length 34.9
  L1 w0.254: v1(-99.4,43.55) -103.35,43.55 -105.075,41.825 D5.2@-105.075,39.582 -102.597,39.582 -100.775,37.76 -100.775,35.15 -92.325,26.7 C29.2@-92.325,23.9
  L4 w0.254: v1(-99.4,43.55) -99.35,43.55 -98.25,42.45 ST3.2@-98.25,40.175
NetC33_1: C33.1 MC1.81 | length 21
  L1 w0.254: v1(-30.875,39.875) -30.025,39.025 MC1.81@-28.05,39.025 ; v1(-15.5,41.55) -14.7,42.35 C33.1@-14.05,42.35
  L4 w0.254: v1(-30.875,39.875) -29.525,41.225 -15.825,41.225 v1(-15.5,41.55)
NetC34_1: C34.1 MC1.125 | length 9.8
  L1 w0.254: MC1.125@-47.815,44.279 -47.815,48.135 -47.5,48.45 -47.125,48.45 -46.625,47.95 v1(-46.625,47.325) ; v1(-44.85,47.75) C34.1@-44.85,49.625
  L3 w0.254: v1(-46.625,47.325) -45.275,47.325 v1(-44.85,47.75)
NetC35_2: C35.2 MC1.31 MC1.145 R15.1 R21.1 ST2.10 | length 264.1
  L1 w0.254: R21.1@-112.975,32.1 -112.975,32.975 -111.55,34.4 v1(-110.725,34.4) ; v1(-95,58.8) -94.975,58.825 C35.2@-93.05,58.825 -93.05,60.325 v1(-91.75,61.625) ; R15.1@-90.625,58.85 v1(-89.375,58.85) ; v1(-61.525,36.525) MC1.145@-53.05,36.525 ; MC1.31@-36.315,19.279 -36.315,15.415 v1(-36.3,15.4)
  L3 w0.254: v1(-100.525,46.475) -100.15,46.85 v1(-96.375,46.85) ; ST2.10@-97.302,55.016 -96.65,55.668 -96.65,55.875 -95,57.525 v1(-95,58.8) ; v1(-91.75,61.625) -89.375,59.25 v1(-89.375,58.85)
  L2 w0.254: v1(-110.725,34.4) -108.825,36.3 -108.825,40.05 -102.4,46.475 v1(-100.525,46.475) ; v1(-96.375,46.85) -86.05,36.525 v1(-61.525,36.525) ; v1(-71.375,66.1) -30.575,66.1 -30,65.525 -30,64.575 -29.6,64.175 -28.7,64.175 -27.775,63.25 -27.775,62.175 -27.3,61.7 -9.05,61.7 -2.425,55.075 -2.425,44.35 -3.8,42.975 -3.8,38.625 -5.05,37.375 v1(-5.05,24.65)
  L4 w0.254: ST2.10@-97.302,55.016 -97.113,55.016 -97.113,53.784 -96.832,53.503 -96.832,47.307 v1(-96.375,46.85) ; v1(-91.75,61.625) -87.275,66.1 v1(-71.375,66.1) ; v1(-36.3,15.4) -14.3,15.4 v1(-5.05,24.65)
NetC36_1: C36.1 MC1.9 Q3.2 | length 11.5
  L1 w0.254: C36.1@-48.2,9.375 -47.225,9.375 -46.975,9.625 Q3.2@-46.975,10.375 -47.8,11.2 -47.8,15 -47.315,15.485 MC1.9@-47.315,19.279
NetC37_1: C37.1 MC1.10 Q3.1 | length 11.8
  L1 w0.254: v1(-46.825,16.3) -46.815,16.31 MC1.10@-46.815,19.279 ; v1(-45.175,11.825) -45.175,11.775 -45.475,11.475 Q3.1@-45.475,10.375 -44.475,10.375 -44.275,10.175 C37.1@-44.275,9.4
  L4 w0.254: v1(-46.825,16.3) -46.825,13.475 v1(-45.175,11.825)
NetD1_K: D1.K D2.K MC1.6 | length 43.3
  L1 w0.254: v1(-62.15,48.725) -62.15,45.75 D2.K@-62.275,45.625 D1.K@-61.025,45.625 ; v1(-49.5,22.225) -48.815,21.54 MC1.6@-48.815,19.279
  L4 w0.254: v1(-62.15,48.725) -55.525,48.725 -53.2,46.4 -53.2,40 -49.5,36.3 v1(-49.5,22.225)
NetD5_1: D5.1 IC3.1 L1.2 | length 18.7
  L1 w0.254: D5.1@-105.075,35.518 -104.868,35.518 -101.625,32.275 -101.625,30.775 -102.6,29.8 L1.2@-102.6,26.6 ; IC3.1@-97.525,24.325 -97.525,24.75 v1(-96.75,25.525)
  L2 w0.254: L1.2@-102.6,26.6 -102.025,26.6 -100.95,25.525 v1(-96.75,25.525)
NetIC1_1: IC1.1 MC1.164 R2.1 | length 62.1
  L1 w0.254: v1(-61.9,26.525) -61.4,27.025 -59.796,27.025 -59.369,27.025 -59.369,27.887 -58.515,27.887 -58.515,27.025 -58.515,26.629 -57.661,26.629 -57.661,27.025 -57.661,27.533 -56.807,27.533 -56.807,27.025 -56.807,26.517 -55.953,26.517 -55.953,27.025 -55.526,27.025 MC1.164@-53.05,27.025 ; IC1.1@-58.28,11.449 -57.131,10.3 -56.35,10.3 v1(-56.05,10.6) -56.05,12.1 R2.1@-56.875,12.925
  L4 w0.254: v1(-61.9,26.525) -61.9,25.875 -61.9,25.417 -62.22,25.417 -62.22,24.563 -61.9,24.563 -60.9,24.563 -60.9,23.709 -61.9,23.709 -62.9,23.709 -62.9,22.855 -61.9,22.855 -60.9,22.855 -60.9,22.001 -61.9,22.001 -62.9,22.001 -62.9,21.147 -61.9,21.147 -60.9,21.147 -60.9,20.293 -61.9,20.293 -62.9,20.293 -62.9,19.439 -61.9,19.439 -60.9,19.439 -60.9,18.585 -61.9,18.585 -62.9,18.585 -62.9,17.731 -61.9,17.731 -60.9,17.731 -60.9,16.877 -61.9,16.877 -61.9,16.45 -61.589,16.139 -62.296,15.431 -61.692,14.828 -60.985,15.535 -60.278,16.242 -59.674,15.638 -60.381,14.931 -61.088,14.224 -60.484,13.62 -59.777,14.327 -59.475,14.025 v1(-56.05,10.6)
NetIC1_2: IC1.2 MC1.27 | length 62.2
  L1 w0.254: v1(-61.45,10.275) -60.85,10.875 -59.502,10.875 IC1.2@-59.178,10.551 ; MC1.27@-38.315,19.279 -38.315,13.965 v1(-38.3,13.95)
  L3 w0.254: v1(-61.45,10.275) -64.325,7.4 -64.325,6.125 -63.075,4.875 -62.648,4.875 -62.648,5.725 -61.794,5.725 -61.794,4.875 -61.794,4.025 -60.94,4.025 -60.94,4.875 -60.94,5.725 -60.086,5.725 -60.086,4.875 -60.086,4.025 -59.232,4.025 -59.232,4.875 -58.175,4.875 -37.881,4.875 -37.031,4.025 v1(-34.625,4.025)
  L4 w0.254: v1(-38.3,13.95) -36.05,11.7 -36.05,6.3 -34.625,4.875 v1(-34.625,4.025)
NetIC1_3: IC1.3 MC1.1 | length 63.9
  L1 w0.254: IC1.3@-60.076,9.653 -59.148,8.725 v1(-58.762,8.725) ; v1(-52,8.725) -51.5,9.225 -51.5,9.595 -51.78,9.875 -52.575,9.875 -53,10.3 -53,11.625 -54.225,12.85 -54.225,13.1 -54.225,13.374 -54.844,13.374 -54.844,14.228 -54.225,14.228 -53.225,14.228 -53.225,15.082 -54.225,15.082 -55.225,15.082 -55.225,15.936 -54.225,15.936 -53.225,15.936 -53.225,16.79 -54.225,16.79 -55.225,16.79 -55.225,17.644 -54.225,17.644 -53.225,17.644 -53.225,18.498 -54.225,18.498 -54.225,18.925 -54.225,19.45 -53.675,20 -52.875,20 -52.575,19.7 -52.575,19.2 -52.575,18.773 -51.717,18.773 -51.717,17.919 -52.575,17.919 -52.575,17.35 -52.575,11.225 -52.15,10.8 -51.65,10.8 -51.315,11.135 -51.315,11.85 -51.315,12.349 -52.221,12.349 -52.221,13.203 -51.315,13.203 -51.169,13.203 -51.169,14.057 -51.315,14.057 -52.221,14.057 -52.221,14.911 -51.315,14.911 -50.315,14.911 -50.315,15.765 -51.315,15.765 -52.221,15.765 -52.221,16.619 -51.315,16.619 -50.315,16.619 -50.315,17.473 -51.315,17.473 -51.315,17.9 MC1.1@-51.315,19.279
  L2 w0.254: v1(-58.762,8.725) v1(-52,8.725)
NetIC1_5: IC1.5 MC1.26 | length 62.1
  L1 w0.254: IC1.5@-55.67,3.451 -54.794,2.575 v1(-54.325,2.575) ; MC1.26@-38.815,19.279 -38.815,12.965 v1(-38.575,12.725)
  L3 w0.254: v1(-54.325,2.575) -52.7,0.95 -52.575,0.95 -52.162,0.95 -52.162,0.456 -51.308,0.456 -51.308,0.95 -51.308,1.444 -50.454,1.444 -50.454,0.95 -50.454,0.456 -49.6,0.456 -49.6,0.95 -49.6,1.095 -48.746,1.095 -48.746,0.95 -48.746,0.82 -47.892,0.82 -47.892,0.95 -47.892,1.444 -47.038,1.444 -47.038,0.95 -47.038,0.456 -46.184,0.456 -46.184,0.95 -46.184,1.444 -45.33,1.444 -45.33,0.95 -45.33,0.456 -44.476,0.456 -44.476,0.95 -44.476,1.444 -43.622,1.444 -43.622,0.95 -43.622,0.456 -42.768,0.456 -42.768,0.95 -42.768,1.444 -41.914,1.444 -41.914,0.95 -41.914,0.456 -41.06,0.456 -41.06,0.95 -41.06,1.444 -40.206,1.444 -40.206,0.95 -40.206,0.456 -39.352,0.456 -39.352,0.95 -38.925,0.95 v1(-36.525,0.95)
  L4 w0.254: v1(-38.575,12.725) -37.95,12.1 -37.648,11.798 -37.148,12.298 -36.544,11.694 -37.044,11.194 -36.675,10.825 -36.675,10.398 -37.675,10.398 -37.675,9.544 -36.675,9.544 -36.404,9.544 -36.404,8.69 -36.675,8.69 -37.381,8.69 -37.381,7.836 -36.675,7.836 -36.404,7.836 -36.404,6.982 -36.675,6.982 -36.823,6.982 -36.823,6.128 -36.675,6.128 -36.427,6.128 -36.427,5.274 -36.675,5.274 -37.675,5.274 -37.675,4.42 -36.675,4.42 -36.675,3.566 -36.675,3.325 -35.875,2.525 -35.875,1.6 v1(-36.525,0.95)
NetIC1_6: IC1.6 R3.1 | length 63.2
  L1 w0.254: IC1.6@-54.772,4.349 -54.772,3.747 v1(-53.6,2.575) ; R3.1@-11.55,28 -11.175,28 v1(-10.875,27.7)
  L2 w0.254: v1(-53.6,2.575) -49.85,2.575 -48.7,1.425 -48.7,1.075 -48.15,0.525 -29.25,0.525 -10.875,18.9 v1(-10.875,27.7)
NetIC1_7: IC1.7 MC1.24 | length 62.7
  L1 w0.254: v1(-55.1,7.1) -55.725,7.1 -56.275,6.55 -56.725,6.55 -57.152,6.55 -57.152,6.05 -58.006,6.05 -58.006,6.55 -58.006,7.05 -58.86,7.05 -58.86,6.55 -58.86,6.05 -59.714,6.05 -59.714,6.55 -59.714,7.05 -60.568,7.05 -60.568,6.55 -60.568,6.05 -61.422,6.05 -61.422,6.55 -61.422,7.05 -62.276,7.05 -62.276,6.55 -62.75,6.55 -65.625,6.55 -66.15,6.025 -66.15,5.275 -65.375,4.5 -62.725,4.5 -62.298,4.5 -62.298,5 -61.444,5 -61.444,4.5 -61.444,4 -60.59,4 -60.59,4.5 -60.59,5 -59.736,5 -59.736,4.5 -59.736,4 -58.882,4 -58.882,4.5 -58.882,5 -58.028,5 -58.028,4.5 -57.275,4.5 -55.65,6.125 -54.752,6.125 IC1.7@-53.874,5.247 ; v1(-40.25,13.55) -39.815,13.985 MC1.24@-39.815,19.279
  L3 w0.254: v1(-44.9,7.075) -44.7,7.075 -43.45,8.325 -43.45,9.275 -42.44,10.285 -42.44,10.675 -43.025,11.26 v1(-43.025,11.975)
  L2 w0.254: v1(-55.1,7.1) -55.075,7.075 v1(-44.9,7.075)
  L4 w0.254: v1(-43.025,11.975) -42.475,12.525 -41.275,12.525 v1(-40.25,13.55)
NetIC2_2: IC2.2 MC1.104 | length 47.5
  L1 w0.254: MC1.104@-37.315,44.279 -37.315,52.235 v1(-36.2,53.35)
  L4 w0.254: v1(-36.2,53.35) -35.7,53.35 -35.218,53.35 -35.218,53.646 -34.364,53.646 -34.364,53.35 -34.364,52.367 -33.51,52.367 -33.51,53.35 -33.51,53.646 -32.656,53.646 -32.656,53.35 -32.656,52.35 -31.802,52.35 -31.802,53.35 -31.375,53.35 -31.342,53.317 -30.739,52.714 -31.446,52.006 -30.842,51.403 -30.135,52.11 -29.672,52.572 -29.069,51.968 -29.531,51.506 -30.238,50.799 -29.634,50.195 -28.927,50.902 -28.625,50.6 -28.625,50.152 -28.625,49.725 -28.625,49.175 -28.625,48.748 -28.329,48.748 -28.329,47.894 -28.625,47.894 -29.625,47.894 -29.625,47.04 -28.625,47.04 -28.329,47.04 -28.329,46.186 -28.625,46.186 -28.625,45.725 -28.927,45.423 -29.634,46.13 -30.238,45.526 -29.531,44.819 -29.913,44.437 -32.9,41.45 IC2.2@-35.57,41.45
NetIC2_4: IC2.4 MC1.105 | length 47.5
  L1 w0.254: MC1.105@-37.815,44.279 -37.815,53.185 v1(-37,54)
  L4 w0.254: v1(-37,54) -30.6,54 -26.975,50.375 -26.975,49.775 -26.975,49.348 -25.975,49.348 -25.975,48.494 -26.975,48.494 -27.975,48.494 -27.975,47.64 -26.975,47.64 -25.975,47.64 -25.975,46.786 -26.975,46.786 -27.975,46.786 -27.975,45.932 -26.975,45.932 -26.975,45.4 -27.277,45.098 -26.57,44.391 -27.174,43.787 -27.881,44.494 -28.1,44.275 -32.525,39.85 IC2.4@-35.57,39.85
NetIC2_5: IC2.5 MC1.142 | length 47.1
  L1 w0.254: v1(-57.587,38.037) -57.575,38.025 MC1.142@-53.05,38.025
  L3 w0.254: v1(-56.625,41.225) -51.875,41.225 -51.463,41.225 -51.463,42.225 -50.609,42.225 -50.609,41.225 -49.755,41.225 -49.755,41.743 -48.901,41.743 -48.901,41.225 -48.901,40.225 -48.047,40.225 -48.047,41.225 -48.047,42.225 -47.193,42.225 -47.193,41.225 -47.193,40.729 -46.339,40.729 -46.339,41.225 -46.339,42.225 -45.485,42.225 -45.485,41.225 -45.485,40.729 -44.631,40.729 -44.631,41.225 -44.631,42.225 -43.777,42.225 -43.777,41.225 -43.35,41.225 -42.1,39.975 -41.914,39.975 -41.06,39.975 -41.06,40.975 -40.206,40.975 -40.206,39.975 -40.206,38.975 -39.352,38.975 -39.352,39.975 -38.925,39.975 v1(-38.05,39.975)
  L2 w0.254: v1(-57.587,38.037) -57.587,40.263 v1(-56.625,41.225)
  L4 w0.254: v1(-38.05,39.975) -37.125,39.05 IC2.5@-35.57,39.05